# Altium PCB SPARKy watch PCB MK2.PcbDoc (part 1 of 2)
Units mm, origin at the board's own origin, x right, y up, seen from the top; angles counter-clockwise.
Board outline 67 x 34.75 mm, 2 copper layers (Component Side, Bottom Layer), stack 0.325 mm thick; 94 components, 71 nets, 348 pads, 81 vias.
Unrouted connection lines stored in the file: 3.
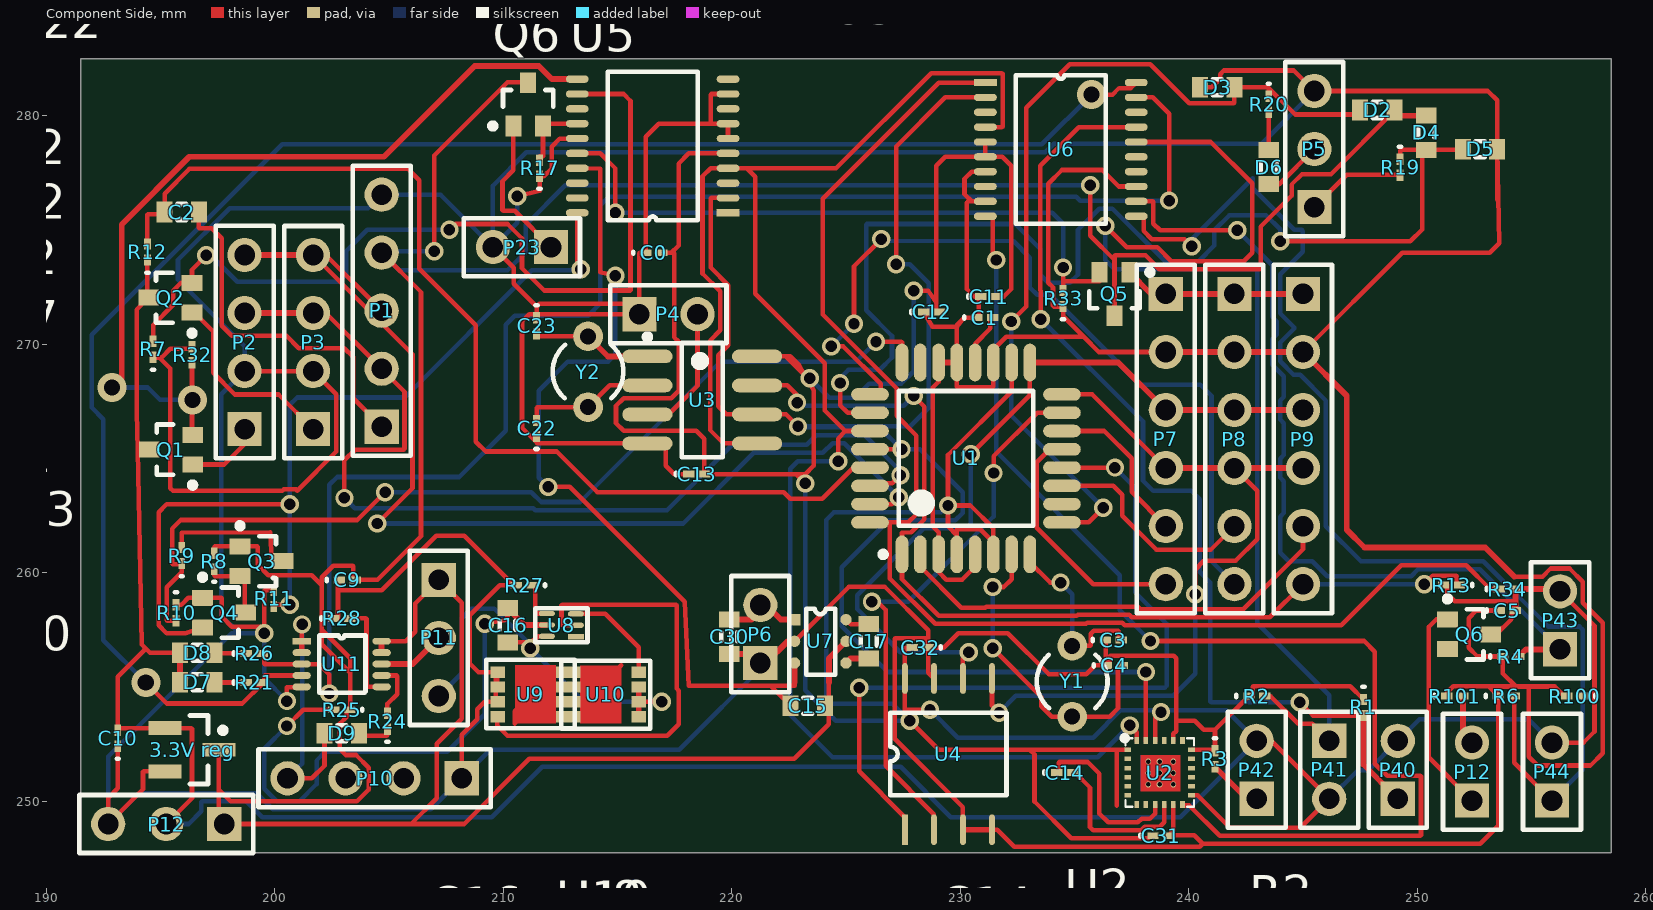
[diagram p0: Component Side view]
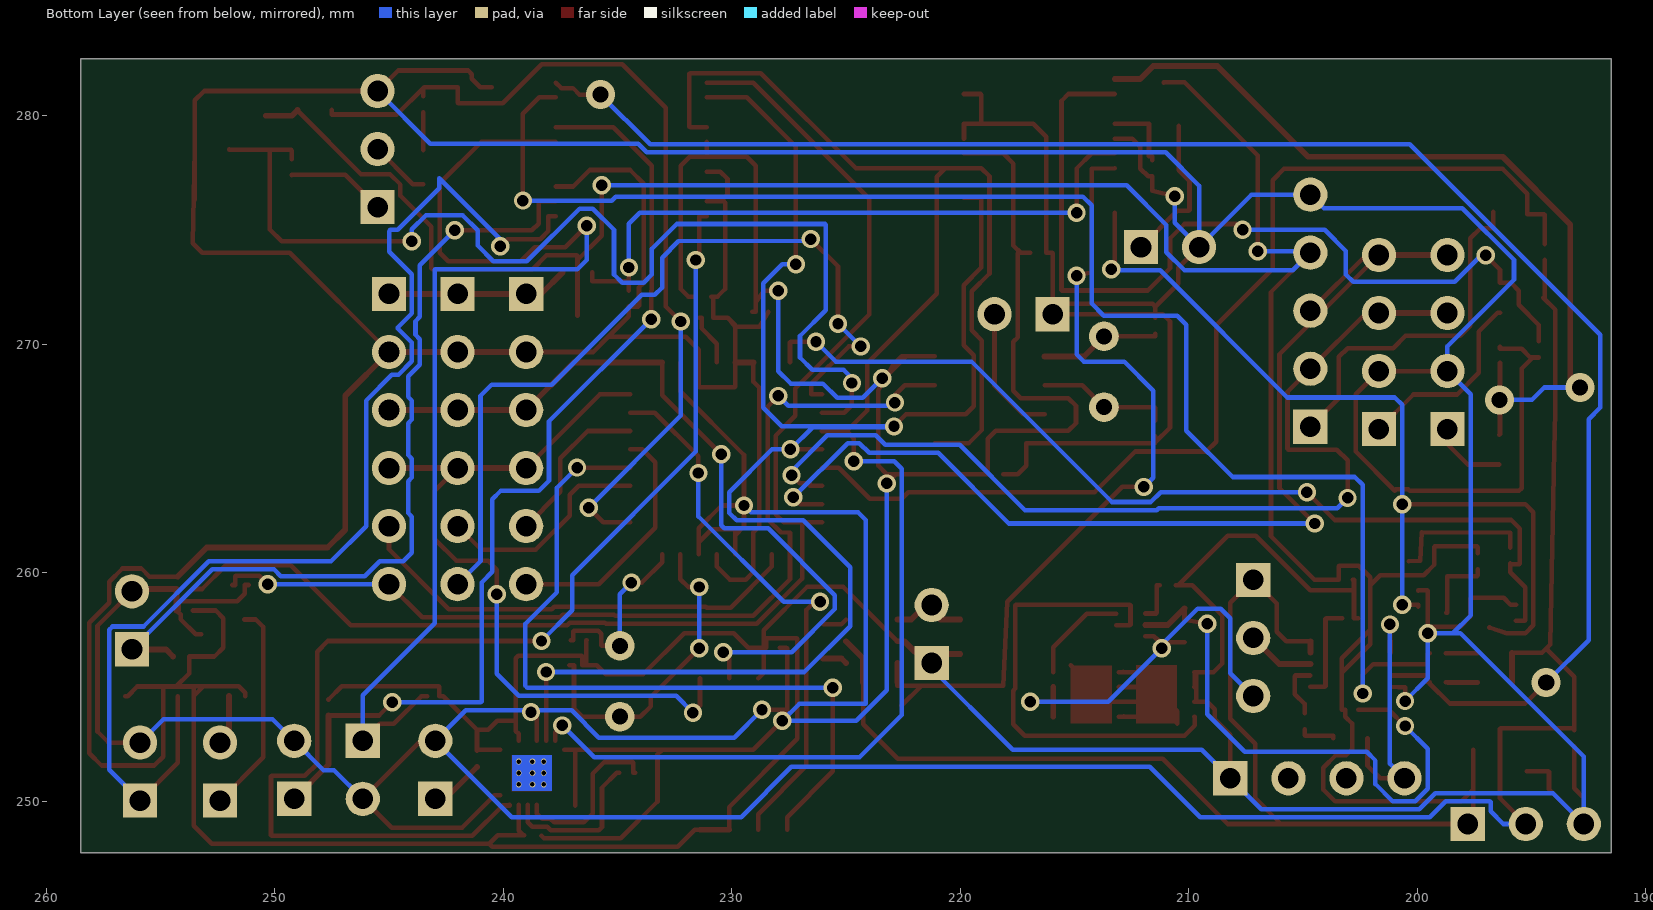
[diagram p1: Bottom Layer view, seen from below]

## Layer stack, top to bottom
Top Solder: solder mask 0.0102, Solder Resist, Dk 3.5
Component Side: signal copper 0.0356
Dielectric 1: core 0.254, FR-4, Dk 4.2
Bottom Layer: signal copper 0.0356
Solder Side: solder mask 0.0102, Solder Resist, Dk 3.5

## Board outline
191.5,247.75 191.5,282.5 258.5,282.5 258.5,247.75

## Design rules (kind name [scope] priority, off if disabled: settings)
AcuteAngle [All] p1: minimum=9.00000000000000E+0001 checktracksonly=FALSE
AssemblyTestpoint [All] p1: testpointundercomponent=TRUE minsize=1 maxsize=2.5 preferedsize=1.5 minholesize=0 maxholesize=1 preferedholesize=0.8 testpointgrid=0.025 usegrid=TRUE gridtolerance=0 allowsidetop=TRUE allowsidebottom=TRUE
Clearance "Clearance Ceramic to Board" [InComponentClass('Ceramic') vs ((ObjectKind = 'Arc') Or (ObjectKind = 'Track')) And (Layer = 'KeepOutLayer') And (Keepout = 'False')] p1: gap=4.95 // Ceramic component to board outline
Clearance [All] p2: gap=0.15
ComponentClearance [All] p1: gap=0.25 collisioncheckmode=3 verticalgap=0.25 showdistances=FALSE
DiffPairsRouting [All] p1: maxlimit=0.1 minlimit=0.1 mostfreqgap=0.1 toplayer_minwidth=0.15 toplayer_maxwidth=0.15 toplayer_prefwidth=0.15 bottomlayer_minwidth=0.15 bottomlayer_maxwidth=0.15 bottomlayer_prefwidth=0.15 maxuncoupledlength=12.7
FabricationTestpoint [All] p1: side=3 testpointundercomponent=TRUE minsize=1 maxsize=2.5 preferedsize=1.5 minholesize=0 maxholesize=1 preferedholesize=0.8 testpointgrid=0.025 allowsidetop=TRUE allowsidebottom=TRUE usegrid=TRUE gridtolerance=0
Height [All] p1: minheight=0 maxheight=50 prefheight=12.5
HoleSize [All] p1: absolutevalues=TRUE maxlimit=6.5 minlimit=0.3 maxpercent=80.000 minpercent=20.000
HoleToHoleClearance [All] p1: gap=0.25 allowstackedmicrovias=TRUE
MinimumAnnularRing [All] p1: minimumring=0.15
MinimumSolderMaskSliver [All] p1: minsoldermaskwidth=0.15
PlaneClearance [All] p1: clearance=0.5
PlaneConnect [All] p1: planeconnectstyle=Relief reliefexpansion=0.5 reliefentries=4 reliefconductorwidth=0.25 reliefairgap=0.25
PolygonConnect [All] p1: connectstyle=Relief reliefconductorwidth=0.25 reliefentries=4 polygonreliefangle="90 Angle" airgapwidth=0.25
RoutingCorners [All] p1: cornerstyle=45-Degree minsetback=2.5 maxsetback=2.5
RoutingVias [All] p1: holewidth=0.5 width=0.8 viastyle="Through Hole" minholewidth=0.3 minwidth=0.6 maxholewidth=0.7 maxwidth=1
SilkToSilkClearance [All] p1: silktosilkclearance=0.25
SilkToSolderMaskClearance [IsPad] p1: minsilkscreentomaskgap=0.25 clearancetoexposedcopper=TRUE
SolderMaskExpansion [All] p1: expansion=0.075
UnpouredPolygon [All] p1: allowunpoured=FALSE
Width [All] p1: maxlimit=1 minlimit=0.15 preferedwidth=0.2
16 further rules are at their usual default settings.

## Classes and differential pairs
component class "battery sensor": R8 R9 R10 R11
component class Designator: R12 R13 U1 Y1
component class Prefrels: R17 R19 R20 U5 U7
component class RTC: U2 U3 Y2
component class Screens: R33
component class "Serial devices": R7 R32
component class "V stuff": R21 R24 R25 R26 R27 R28 U8 U9 U10 U11

## Components (designator, comment, footprint, x,y, rotation, side; value= is the part's Value field where it differs from the comment)
"3.3V reg" "Volt Reg" SOT23_M 196.377,252.25 r0 top
C0 "Cap Semi" 0603 216.589,274 r0 top
C1 "Cap Semi" 0603 231.075,271.161 r0 top
C2 "Cap" J1-0603 195.927,275.784 r180 top
C3 "Cap Semi" 0603 236.7,257.05 r0 top
C4 "Cap Semi" 0603 236.75,255.943 r0 top
C5 "Cap Semi" 0603 253.949,258.343 r0 top
C9 "Cap Semi" 0603 203.177,259.682 r0 top
C10 "Cap Semi" 0603 193.127,252.75 r90 top
C11 "Cap Semi" 0603 231.25,272.084 r0 top
C12 "Cap Semi" 0603 228.75,271.411 r0 top
C13 "Cap Semi" 0603 218.46,264.311 r0 top
C14 "Cap Semi" 0603 234.579,251.25 r0 top
C15 "Cap" J1-0603 223.329,254.175 r0 top
C16 "Cap" J1-0603 210.187,257.696 r90 top
C17 "Cap" J1-0603 226,256.995 r90 top
C22 "Cap" 0603 211.46,266.311 r90 top
C23 "Cap" 0603 211.46,270.811 r270 top
C30 "C16" J1-0603 219.885,257.196 r270 top
C31 "Cap Semi" 0603 238.785,248.483 r0 top
C32 "Cap Semi" 0603 228.25,256.721 r180 top
D2 "Diode" J1-0603 248.25,280.25 r0 top
D3 "Diode" J1-0603 241.25,281.25 r0 top
D4 "Diode" J1-0603 250.399,279.25 r90 top
D5 "Diode" J1-0603 252.75,278.54 r180 top
D6 "de ??" J1-0603 243.5,277.75 r270 top
D7 "FULL" J1-0603 196.602,255.196 r0 top
D8 "Chargeing" J1-0603 196.602,256.5 r0 top
D9 "power ok" J1-0603 202.927,252.964 r0 top
P1 "FTDI headder" HDR1X5 204.677,266.384 r90 top
P2 "ESP8266" HDR1X4 198.677,266.284 r90 top
P3 "RN42-1/rm" HDR1X4 201.676,266.284 r90 top
P4 "Header 2" HDR1X2 215.96,271.311 r0 top
P5 "External Port" HDR1X3 245.5,276 r90 top
P6 "Header Lasar" HDR1X2 221.25,256.045 r90 top
P7 "Screen 1" HDR1X6 239,272.199 r270 top
P8 "Screen 2" HDR1X6 242,272.199 r270 top
P9 "Screen 3" HDR1X6 245,272.199 r270 top
P10 "USB" HDR1X4 208.177,251 r180 top
P11 "battery header" HDR1X3 207.177,259.682 r270 top
P12 "Buzzer" HDR1X2 252.399,250.024 r90 top
P12 "V rails" HDR1X3 197.787,249 r180 top
P23 "LED conector" HDR1X2 212.089,274.25 r180 top
P40 "SW1 (enter)" HDR1X2 249.149,250.099 r90 top
P41 "SW2 (Escape)" HDR1X2 246.149,252.639 r270 top
P42 "SW3" HDR1X2 242.974,250.099 r90 top
P43 "SW4" HDR1X2 256.25,256.643 r90 top
P44 "SW5" HDR1X2 255.899,250.024 r90 top
Q1 "2N7000" ONSC-SOT-323-3-419-04_V 195.452,265.384 r180 top
Q2 "2N7000" ONSC-SOT-323-3-419-04_V 195.427,272.034 r180 top
Q3 "MESFET-N" ONSC-SOT-323-3-419-04_V 199.427,260.5 r0 top
Q4 "MESFET-P" ONSC-SOT-323-3-419-04_V 197.787,258.25 r0 top
Q5 "2N7000" ONSC-SOT-323-3-419-04_V 236.75,272.199 r270 top
Q6 "2N7000" ONSC-SOT-323-3-419-04_V 252.275,257.3 r0 top
Q6 "2N7000" ONSC-SOT-323-3-419-04_V 211.089,280.5 r90 top
R1 "Res1" 0603 247.649,254.099 r270 top
R2 "Res1" 0603 242.974,254.599 r0 top
R3 "Res1" 0603 241.149,251.849 r270 top
R4 "Res1" 0603 254.099,256.33 r0 top
R6 "Res1" 0603 253.899,254.599 r0 top
R7 "Res3" 0603 194.677,269.784 r90 top
R8 "Res3" 0603 197.352,260.5 r90 top
R9 "Res3" 0603 195.928,260.75 r90 top
R10 "Res3" 0603 195.677,258.25 r270 top
R11 "Res11" 0603 199.953,258.868 r270 top
R12 "Res1" 0603 194.427,274.034 r90 top
R13 "Res1" 0603 251.5,259.459 r180 top
R17 "Res1" 0603 211.589,277.7 r90 top
R19 "Res1" 0603 249.25,277.75 r270 top
R20 "Res1" 0603 243.5,280.5 r270 top
R21 "Res1" 0603 199.102,255.196 r0 top
R24 "Res1" 0603 204.927,253.5 r90 top
R25 "Res1" 0603 202.927,254 r180 top
R26 "Res1" 0603 199.102,256.466 r0 top
R27 "Res1" 0603 210.927,259.446 r180 top
R28 "Res1" 0603 202.927,258 r0 top
R32 "Res3" 0603 196.377,269.534 r270 top
R33 "Res3" 0603 234.5,272 r90 top
R34 "Res1" 0603 253.949,259.284 r0 top
R100 "Res1" 0603 256.899,254.599 r180 top
R101 "Res1" 0603 251.649,254.599 r0 top
U1 "ATmega8-16AU" 32A_N 230.25,265 r90 top
U2 "Component_1" MPU-9255 237.328,252.249 r0 top
U3 "MCP79412T-I/SN" SOIC-SN8_N 218.709,267.56 r0 top
U4 "Component_1" SOP8 227.579,248.75 r90 top
U5 "Component_1" SOP20 219.839,275.75 r180 top
U6 "Component_1" SOP20 231.1,281.45 r0 top
U7 "LTC3200" SOP6 222.749,257.945 r0 top
U8 "bq29700" DSE 213.177,257.196 r180 top
U9 "CSD16406Q3" Q3 209.75,255.646 r0 top
U10 "CSD16406Q3" Q3 215.927,253.696 r180 top
U11 "MCP73833/4" SOP10 201.177,257 r0 top
Y1 "16MHz" R38 234.899,255.25 r0 top
Y2 "32.768Mhz" R38 213.71,268.794 r180 top

## Footprints (in the part's own frame and the unit in brackets; to place one, negate y for a bottom-side part, rotate by r counter-clockwise, add the part's x,y. Pads: shape width x height; smd on the part's side, far side on the other; paste and mask are expansions set on the pad)
32A_N [mm] "Thin QFP, 32-Leads, Body 7x7mm, Pitch 0.8mm, IPC Medium Density"
  oval 1.65x0.55 smd: 1(-4.2,2.8) 2(-4.2,2) 3(-4.2,1.2) 4(-4.2,0.4) 5(-4.2,-0.4) 6(-4.2,-1.2) 7(-4.2,-2) 8(-4.2,-2.8) 17(4.2,-2.8) 18(4.2,-2) 19(4.2,-1.2) 20(4.2,-0.4) 21(4.2,0.4) 22(4.2,1.2) 23(4.2,2) 24(4.2,2.8)
  oval 0.55x1.65 smd: 9(-2.8,-4.2) 10(-2,-4.2) 11(-1.2,-4.2) 12(-0.4,-4.2) 13(0.4,-4.2) 14(1.2,-4.2) 15(2,-4.2) 16(2.8,-4.2) 25(2.8,4.2) 26(2,4.2) 27(1.2,4.2) 28(0.4,4.2) 29(-0.4,4.2) 30(-1.2,4.2) 31(-2,4.2) 32(-2.8,4.2)
  silkscreen extent -4.32,-2.95 2.95,3.75, body extent -3.5,-3.5 3.5,3.5, height 1.2
0603 [mm] "Chip Inductor, Body 0.6x0.3mm, IPC High Density"
  rect 0.5x0.3 smd: 1(-0.35,0) 2(0.35,0)
  silkscreen extent -0.9,-0.05 -0.9,0.05, body extent -0.33,-0.18 0.33,0.18, height 0.55
DSE [mm]
  rect 0.7x0.23 smd: 1(0,0)
  oval 0.7x0.23 smd: 2(0,-0.5) 3(0,-1) 4(1.27,-1.016) 5(1.27,-0.516) 6(1.27,-0.016)
  silkscreen extent -0.51,-1.25 1.78,0.25
HDR1X2 [mm] "Connector; Header; 2 Position"
  rect 1.5x1.5 hole 0.9: 1(0,0)
  round 1.5 hole 0.9: 2(2.54,0)
  silkscreen extent -1.27,-1.27 3.81,1.27
HDR1X3 [mm] "Connector; Header; 3 Position"
  rect 1.5x1.5 hole 0.9: 1(0,0)
  round 1.5 hole 0.9: 2(2.54,0) 3(5.08,0)
  silkscreen extent -1.27,-1.27 6.35,1.27
HDR1X4 [mm] "Connector; Header; 4 Position"
  rect 1.5x1.5 hole 0.9: 1(0,0)
  round 1.5 hole 0.9: 2(2.54,0) 3(5.08,0) 4(7.62,0)
  silkscreen extent -1.27,-1.27 8.89,1.27
HDR1X5 [mm] "Connector; Header; 5 Position"
  rect 1.5x1.5 hole 0.9: 1(0,0)
  round 1.5 hole 0.9: 2(2.54,0) 3(5.08,0) 4(7.62,0) 5(10.16,0)
  silkscreen extent -1.27,-1.27 11.43,1.27
HDR1X6 [mm] "Connector; Header; 6 Position"
  rect 1.5x1.5 hole 0.9: 1(0,0)
  round 1.5 hole 0.9: 2(2.54,0) 3(5.08,0) 4(7.62,0) 5(10.16,0) 6(12.7,0)
  silkscreen extent -1.27,-1.27 13.97,1.27
J1-0603 [mm] "Chip Resistor, Body 1.6x0.8mm, IPC High Density"
  rect 0.7x0.9 smd: 1(-0.75,0) 2(0.75,0)
  silkscreen extent -0.2,-0.35 0.2,0.35, body extent -0.85,-0.48 0.85,0.48, height 0.9
MPU-9255 [mm]
  rect 0.3x0.2 smd: 1(0,0) 2(0,-0.4) 3(0,-0.8) 4(0,-1.2) 5(0,-1.6) 6(0,-2) 13(2.8,-2) 14(2.8,-1.6) 15(2.8,-1.2) 16(2.8,-0.8) 17(2.8,-0.4) 18(2.8,0)
  rect 0.2x0.3 smd: 7(0.4,-2.4) 8(0.8,-2.4) 9(1.2,-2.4) 10(1.6,-2.4) 11(2,-2.4) 12(2.4,-2.4) 19(2.4,0.4) 20(2,0.4) 21(1.6,0.4) 22(1.2,0.4) 23(0.8,0.4) 24(0.4,0.4)
  Component Side region: 0.552,-1.817 2.302,-1.817 2.302,-0.227 0.552,-0.227
  Bottom Layer region: 0.549,-1.812 2.299,-1.812 2.299,-0.222 0.549,-0.222
  silkscreen extent -0.23,-2.5 2.9,0.61
ONSC-SOT-323-3-419-04_V [mm] "SOT23, 3-Leads, Body 2x1.25mm, Pitch 0.65mm"
  rect 0.9x0.7 smd: 1(-0.95,0.65) 2(-0.95,-0.65) 3(0.95,0)
  silkscreen extent -1.08,-1.1 0.63,1.67, body extent -0.63,-1 0.63,1, height 1
Q3 [mm]
  rect 0.63x0.5 smd: 1(0,0) 2(0,-0.65) 3(0,-1.3) 4(0,-1.95) 5(2.87,-1.95) 6(2.87,-1.3) 7(2.87,-0.65) 8(2.87,0)
  Component Side region: 0.76,-2.246 2.56,-2.246 2.56,0.304 0.76,0.304
  silkscreen extent -0.5,-2.45 3.38,0.53
R38 [mm] "Crystal, Thru-Hole; 2 Leads; Body 3.1 x 8.2 mm (Dia.xH)"
  round 1.3 hole 0.7: 1(0,1.55) 2(0,-1.55)
  silkscreen extent -1.55,-1.19 1.55,1.17
SOIC-SN8_N [mm] "SOIC, 8-Leads, Body 4.9x3.8mm, Pitch 1.27mm, IPC Medium Density"
  oval 2.2x0.6 smd: 1(-2.4,1.905) 2(-2.4,0.635) 3(-2.4,-0.635) 4(-2.4,-1.905) 5(2.4,-1.905) 6(2.4,-0.635) 7(2.4,0.635) 8(2.4,1.905)
  silkscreen extent -2.52,-2.5 0.9,2.88, body extent -2,-2.5 2,2.5, height 1.75
SOP6 [mm]
  rect 0.5x0.5 smd: 1(0,0)
  round 0.5 smd: 2(0,-0.95) 3(0,-1.9) 4(2.25,-1.9) 5(2.25,-0.95) 6(2.25,0)
  silkscreen extent 0.51,-2.41 1.78,0.48
SOP8 [mm]
  rect 1.345x0.25 smd: 1(0,0)
  oval 1.345x0.25 smd: 2(0,-1.27) 3(0,-2.54) 4(0,-3.81) 5(6.62,-3.81) 6(6.62,-2.54) 7(6.62,-1.27) 8(6.62,0)
  silkscreen extent 1.51,-4.45 5.11,0.64
SOP10 [mm]
  rect 0.8x0.3 smd: 1(0,0)
  oval 0.8x0.3 smd: 2(0,-0.5) 3(0,-1) 4(0,-1.5) 5(0,-2) 6(3.5,-2) 7(3.5,-1.5) 8(3.5,-1) 9(3.5,-0.5) 10(3.5,0)
  silkscreen extent 0.76,-2.25 2.79,0.25
SOP20 [mm]
  rect 1x0.32 smd: 1(0,0)
  oval 1x0.32 smd: 2(0,-0.65) 3(0,-1.3) 4(0,-1.95) 5(0,-2.6) 6(0,-3.25) 7(0,-3.9) 8(0,-4.55) 9(0,-5.2) 10(0,-5.85) 11(6.6,-5.85) 12(6.6,-5.2) 13(6.6,-4.55) 14(6.6,-3.9) 15(6.6,-3.25) 16(6.6,-2.6) 17(6.6,-1.95) 18(6.6,-1.3) 19(6.6,-0.65) 20(6.6,0)
  silkscreen extent 1.34,-6.18 5.26,0.33
SOT23_M [mm] "SOT23, 3-Leads, Body 2.9x1.3mm, Pitch 0.95mm, Lead Span 2.3mm - Reverse Pinning, IPC Low Density"
  rect 1.45x0.6 smd: 1(1.175,0) 2(-1.175,-0.95) 3(-1.175,0.95)
  silkscreen extent -0.1,-1.5 1.48,1.5, body extent -0.7,-1.5 0.7,1.5, height 1.1

## Part data
"3.3V reg": "Voltage Regulator"
C0 C1 C3 C4 C5 C9 C10 C11 C12 C13 C14 C31 C32: "Capacitor (Semiconductor SIM Model)"
C2 C15 C16 C17 C22 C23: "Capacitor"
C30: library part Cap, "Capacitor"
D2 D3 D4 D5: "Default Diode"
D6: library part Diode, "Default Diode"
D7 D8 D9: library part LED1, "Typical RED GaAs LED"
P1: library part "Header 5", "Header, 5-Pin"
P2 P3 P10: library part "Header 4", "Header, 4-Pin"
P4: "Header, 2-Pin"
P5 P11 P12: library part "Header 3", "Header, 3-Pin"
P6 P12 P23 P40 P41 P42 P43 P44: library part "Header 2", "Header, 2-Pin"
P7 P8 P9: library part "Header 6", "Header, 6-Pin"
Q1 Q2 Q5 Q6 Q6: "Small Signal MOSFET, 200 mA, 60 V, N-Channel, 3-Pin TO-92, Bulk Box"
Q3: "N-Channel MESFET"
Q4: "P-Channel MESFET"
R1 R2 R3 R4 R6 R7 R8 R9 R10 R12 R13 R17 R19 R20 R21 R24 R25 R26 R27 R28 R32 R33 R34 R100 R101: "Resistor"
R11: library part Res3, "Resistor"
U1: "8-bit AVR Microcontroller, 4.5-5.5V, 16MHz, 8KB Flash, 512 Bytes EEPROM, 1KB SRAM, 32-pin TQFP, Industrial Grade (-40°C to 85°C)"
U3: "I2C Real-Time Clock/Calendar with EEPROM, SRAM, Unique ID and Battery Switchover, 8-Pin SOIC, Industrial Temperature, Tape and Reel"
U7 U8 U9 U10 U11: library part Component_1
Y1 Y2: library part XTAL, "Crystal Oscillator"

## Via types
v1: diameter 0.8, hole 0.5, Component Side to Bottom Layer, 68 vias
v2: diameter 0.25, hole 0.2, Component Side to Bottom Layer, 9 vias
v3: diameter 1.27, hole 0.711, Component Side to Bottom Layer, 4 vias

## Nets (pads, with @x,y where several pads share a name; then routed paths per layer and width w, separated by ;. In a path a pad name is that pad's centre, name@x,y a point inside that pad or via, vN(x,y) a via of type N, cw(c..) or ccw(c..) an arc to the next point about the centre after c; other vN are vias at no path point)
3.3V: "3.3V reg.3" C0.2 C5.2 C10.2 C11.2 C12.2 C13.2 C31.1 C32.2 D7.1 D8.1 P12.2@195.247,249 P40.2 P41.2 P42.2 P43.2 P44.2 Q1.3 Q2.3 Q6.3@253.225,257.3 R12.1 R13.2 R34.2 U1.4 U1.6 U1.18 U2.1 U2.8 U2.13 U2.22 U3.8 U4.8 U5.5 U6.5 U6.6 | length 277.4
  Component Side w0.2: C10.2@193.127,253.1 C10.2@193.127,253.2 ; R12.1@194.427,273.684 194.427,272.761 194.412,272.745 194.412,272.034 Q2.3@194.477,272.034 193.95,271.507 193.95,267.561 193.961,267.024 193.995,265.374 194.17,256.858 194.354,256.673 ; P12.2@195.247,249 196.377,250.129 196.377,253.165 196.342,253.2 195.202,253.2 C10.2@193.127,253.2 ; D8.1@195.852,256.5 195.852,256.489 194.539,256.489 194.354,256.673 ; C0.2@216.939,274 217.358,274 ; U5.5@219.839,278.35 218.123,278.35 217.678,277.906 217.678,274.32 217.358,274 ; U3.8@221.109,269.466 222.367,269.466 ; v1(223.215,263.906) 222.81,264.311 ; v1(223.418,268.503) 223.329,268.503 v1@223.19,268.643 ; C32.2@227.9,256.721 227.608,256.721 227.579,256.692 U4.8@227.579,255.37 227.579,253.995 ; v1(227.965,272.339) 228.6,272.339 228.956,271.831 ; v1(228.676,253.995) 227.579,253.995 ; C12.2@229.1,271.411 228.956,271.411 228.956,271.831 ; U1.4@229.85,260.8 229.85,261.64 ; U6.5@231.1,278.85 231.089,278.85 U6.6@231.089,278.2 ; U1.6@231.45,260.8 U1.6@231.45,261.331 ; C11.2@231.6,272.084 231.902,272.084 232.232,272.415 232.232,277.812 231.845,278.2 U6.6@231.1,278.2 U6.6@231.089,278.2 ; U1.18@232.25,269.2 232.25,267.937 229.464,265.151 v1(229.464,262.941) ; 236.855,249.809 236.855,252.173 236.931,252.249 ; U2.1@237.328,252.249 236.931,252.249 ; C31.1@238.328,248.483 238.218,248.372 234.86,248.372 233.25,249.983 233.25,252.049 233.05,252.249 ; U2.22@238.528,252.649 238.528,253.641 v1(238.785,253.898) ; U2.13@240.128,250.249 240.388,250.249 241.805,248.833 244.882,248.833 P41.2@246.149,250.099 243.609,252.639 P42.2@242.974,252.639 ; R13.2@251.15,259.459 251.308,259.459 251.308,259.08 251.638,258.75 254.178,258.75 254.203,258.724 254.203,258.343 C5.2@254.251,258.295 ; Q6.3@253.225,257.3 253.462,257.3 254.124,257.962 254.124,258.168 C5.2@254.251,258.295 ; C5.2@254.299,258.343 C5.2@254.251,258.295 ; P44.2@255.899,252.564 257.276,252.564 257.759,253.047 257.759,257.674 P43.2@256.25,259.183 ; C10.2@193.127,253.2 193.127,255.446 194.354,256.673 ; 217.358,274 217.449,274 217.475,273.975 217.475,270.307 217.678,270.104 217.678,267.97 217.348,267.64 215.265,267.64 214.935,267.31 214.935,266.548 215.265,266.217 218.44,266.217 218.796,265.862 218.796,264.311 C13.2@218.81,264.311 222.81,264.311 ; 222.367,269.466 v1@223.19,268.643 ; 222.367,269.466 222.567,269.466 222.91,269.123 v1@223.19,268.643 ; 222.81,264.311 223.215,264.311 223.593,264.688 223.593,267.952 223.309,268.439 v1@223.19,268.643 ; 227.579,253.995 227.579,253.726 v1(227.787,253.517) 229.055,252.249 233.05,252.249 ; 228.956,271.831 228.956,277.812 229.343,278.2 U6.6@231.089,278.2 ; v1(229.464,262.941) 229.464,262.026 229.85,261.64 ; v1(229.464,262.941) 230.447,262.941 231.45,261.938 U1.6@231.45,261.331 ; 229.85,261.64 229.85,261.874 229.878,261.902 230.879,261.902 U1.6@231.45,261.331 ; 233.05,252.249 236.931,252.249
  Component Side w0.254: D7.1@195.852,255.196 D8.1@195.852,256.489 ; C5.2@254.299,258.343 R34.2@254.299,259.284 256.149,259.284 P43.2@256.25,259.183
  Bottom Layer w0.2: P12.2@195.247,249 196.232,249 196.787,249.555 196.787,249.963 196.825,250 198.755,250 199.455,249.3 209.5,249.3 211.7,251.5 227.39,251.5 229.59,249.3 239.635,249.3 P42.2@242.974,252.639 241.639,253.975 v1@238.785,253.975 ; v1(223.215,263.906) 223.215,254.851 224.549,253.517 v1(227.787,253.517) 227.051,254.254 224.142,254.254 224.142,262.306 224.472,262.636 229.159,262.636 v1(229.464,262.941) ; v1(223.418,268.503) 224.272,267.65 225.389,267.65 226.016,268.277 227.421,268.277 227.965,268.821 v1(227.965,272.339) ; v1(228.676,253.995) 229.89,252.781 235.814,252.781 237.007,253.975 v1@238.785,253.975 ; v1(238.785,253.898) v1@238.785,253.975 ; P41.2@246.149,250.099 247.408,251.358 247.868,251.358 P40.2@249.149,252.639 250.101,253.591 254.872,253.591 P44.2@255.899,252.564
GND: "3.3V reg.2" C0.1 C1.1 C3.1 C4.1 C5.1 C9.1 C10.1 C11.1 C12.1 C13.1 C14.1 C22.1 C23.1 C30.2 C31.2 C32.1 D3.1 D5.1 P1.5 P2.2 P3.2 P4.1 P5.3 P6.1 P7.2 P8.2 P9.2 P10.1 P12.3 P23.2 Q4.1 R1.1 R2.1 R3.1 R4.1 R6.1 R7.1 R10.1 R11.1 R17.1 R27.2 R28.1 R32.1 R33.1 R100.2 R101.1 U1.3 U1.5 U1.19 U1.21 U1.22 U2.9 U2.11 U2.18 U2.20 U3.4 U4.3 U4.4 U4.7 U5.6 U5.7 U5.9 U5.15 U6.7 U6.9 U6.13 U7.2 U9.1 U9.2 U9.3 U11.5 | length 467.5
  Component Side w0.2: C10.1@193.127,252.4 193.127,250.559 192.707,250.139 P12.3@192.707,249 194.234,250.526 194.234,251.275 194.259,251.3 195.202,251.3 ; R7.1@194.677,269.434 194.677,269.418 194.945,269.418 ; R10.1@195.677,258.6 195.915,258.6 196.215,258.9 Q4.1@196.837,258.9 197.663,258.9 197.688,258.875 197.688,258.064 198.12,257.632 199.517,257.632 v1@199.542,257.658 ; R32.1@196.377,269.884 196.377,269.799 195.428,269.799 195.047,269.418 194.945,269.418 ; P2.2@198.677,268.824 200.762,268.824 ; v1(199.542,257.353) v1@199.542,257.658 ; R11.1@199.953,259.218 199.953,259.232 199.568,259.232 199.542,259.207 v1@199.542,257.658 ; v1(200.533,254.381) 200.533,254.975 U11.5@201.177,255 ; 200.763,268.824 P3.2@201.676,268.824 202.692,267.808 202.692,265.303 200.98,263.591 200.929,263.642 200.391,263.642 200.326,263.577 195.545,263.577 195.428,263.695 195.428,268.935 194.945,269.418 ; R28.1@202.577,258 202.768,258 202.768,259.232 ; C9.1@202.827,259.682 202.768,259.682 202.768,259.232 ; P10.1@208.177,251 208.177,252.902 208.866,253.591 208.866,254.018 209.194,254.346 U9.3@209.677,254.346 ; P23.2@209.549,274.25 210.461,273.338 210.461,272.639 211.46,271.639 ; U9.3@209.75,254.346 U9.3@209.677,254.346 ; U9.2@209.75,254.996 209.728,254.996 U9.1@209.728,255.646 ; U9.1@209.75,255.646 U9.1@209.728,255.646 ; R27.2@210.577,259.446 R27.2@210.464,259.446 ; v1(210.617,276.479) 211.589,276.708 R17.1@211.589,277.343 ; C22.1@211.46,265.961 211.46,265.707 ; C23.1@211.46,271.161 C23.1@211.46,271.311 ; R17.1@211.589,277.35 R17.1@211.589,277.343 ; U5.15@213.239,279 212.471,279 212.115,278.644 212.115,277.685 211.772,277.343 R17.1@211.589,277.343 ; C0.1@216.239,274 C0.1@216.23,274 ; C13.1@218.11,264.311 217.487,264.311 217.119,264.679 217.119,265.656 U3.4@216.309,265.656 211.512,265.656 ; U5.6@219.839,279 219.837,279 U5.7@219.837,279.65 ; U5.7@219.839,279.65 U5.7@219.837,279.65 ; U5.9@219.839,280.95 219.1,280.95 219.075,280.925 219.075,279.675 219.1,279.65 ; U7.2@222.749,256.995 225.129,259.375 226.705,259.375 228.6,257.48 C32.1@228.6,256.721 ; C12.1@228.4,271.411 228.778,270.764 229.85,270.764 ; U4.7@228.849,255.37 228.6,255.619 C32.1@228.6,256.721 ; U1.22@229.05,269.2 229.05,268.351 228.803,268.104 228.803,262.019 229.05,261.772 U1.3@229.05,260.8 229.05,260.041 229.393,259.698 230.079,259.698 230.65,260.269 U1.5@230.65,260.8 ; U4.3@230.119,248.75 230.119,249.738 227.127,252.73 227.127,257.099 227.152,257.124 228.473,257.124 228.498,257.099 228.498,256.721 C32.1@228.6,256.721 ; C11.1@230.9,272.084 C11.1@230.81,272.084 ; U6.9@231.1,276.25 230.505,276.25 ; U6.7@231.1,277.55 230.505,277.55 230.188,277.232 230.188,276.567 230.505,276.25 ; U4.4@231.389,248.75 231.615,248.75 232.365,248 240.482,248 240.614,248.133 ; C14.1@234.229,251.25 234.315,251.25 234.315,251.689 234.34,251.714 235.585,251.714 236.093,251.206 236.093,249.453 236.474,249.072 237.777,249.072 237.937,249.233 238.303,249.233 238.528,249.458 U2.9@238.528,249.849 ; C3.1@236.35,257.05 236.372,257.05 C4.1@236.372,255.943 ; U6.13@237.7,276.9 236.931,276.9 236.209,277.622 234.455,277.622 233.85,277.017 233.85,272.694 234.061,272.483 234.061,271.675 234.086,271.65 R33.1@234.5,271.65 234.5,271.226 235.397,270.329 ; P7.2@239,269.659 236.068,269.659 235.397,270.329 ; C31.2@239.075,248.5 C31.2@239.116,248.5 ; U2.11@239.328,249.849 239.328,248.712 C31.2@239.116,248.5 ; U2.20@239.328,252.649 239.328,252.942 239.446,253.06 239.446,253.535 ; U2.18@240.128,252.249 R3.1@241.149,252.249 ; D3.1@240.5,281.25 241.001,281.25 241.373,281.623 241.373,281.815 241.535,281.977 244.603,281.977 P5.3@245.5,281.08 253.09,281.08 253.5,280.67 D5.1@253.5,278.54 ; R3.1@241.149,252.199 R3.1@241.149,252.249 ; P9.2@245,269.659 249.344,274.002 253.182,274.002 253.598,274.418 D5.1@253.5,278.54 ; R1.1@247.649,254.449 247.072,255.026 242.824,255.026 242.797,254.999 242.797,254.599 R2.1@242.624,254.599 241.149,253.124 ; R101.1@251.299,254.599 251.299,254.749 251.576,255.026 253.21,255.026 ; 253.5,276.33 D5.1@253.5,278.54 ; C5.1@253.599,258.343 252.592,258.343 252.25,258.001 252.25,256.721 252.641,256.33 R4.1@253.746,256.33 ; R4.1@253.749,256.33 R4.1@253.746,256.33 ; 254.25,259.829 255.482,259.829 255.836,260.183 256.664,260.183 257.25,259.597 257.25,258.678 258.115,257.813 258.115,252.095 257.581,251.562 255.27,251.562 254.889,251.943 254.889,254.991 254.864,255.016 ; R100.2@256.549,254.599 256.438,254.599 256.022,255.016 ; 202.768,259.232 204.684,259.232 207.072,261.62 208.291,261.62 R27.2@210.464,259.446 ; U9.3@209.677,254.346 U9.1@209.677,255.646 ; U9.1@209.677,255.646 U9.1@209.728,255.646 ; U9.1@209.677,255.646 208.915,255.646 208.537,256.025 208.537,258.143 209.84,259.446 R27.2@210.464,259.446 ; 211.46,265.707 211.512,265.656 ; 211.46,265.707 210.818,266.349 210.818,270.992 211.137,271.311 C23.1@211.46,271.311 ; 211.46,265.707 211.46,265.684 211.489,265.656 211.512,265.656 ; C23.1@211.46,271.311 P4.1@215.96,271.311 ; C23.1@211.46,271.311 211.46,271.639 ; 211.46,271.639 211.583,271.763 215.509,271.763 P4.1@215.96,271.311 ; P4.1@215.96,271.311 215.96,273.984 215.976,274 C0.1@216.23,274 ; C0.1@216.23,274 216.23,279.082 216.798,279.65 219.1,279.65 ; 219.1,279.65 U5.7@219.837,279.65 ; C32.1@228.6,256.721 229.282,256.721 229.913,257.352 232.08,257.352 233.882,255.55 235.522,255.55 235.915,255.943 C4.1@236.372,255.943 ; 229.85,270.764 229.85,270.827 230.184,271.161 ; 229.85,270.764 U1.21@229.85,269.2 229.85,268.148 229.875,268.122 231.425,268.122 231.45,268.148 U1.19@231.45,269.2 231.45,269.758 232.021,270.329 235.397,270.329 ; 229.85,270.764 230.184,271.161 ; 230.184,271.161 C1.1@230.725,271.161 230.81,271.161 C11.1@230.81,272.084 ; 230.505,276.25 230.353,276.25 230.294,276.191 230.294,272.415 230.624,272.084 C11.1@230.81,272.084 ; C4.1@236.372,255.943 C4.1@236.4,255.943 236.55,255.943 236.55,256.334 236.576,256.36 239.347,256.36 239.446,256.261 239.446,253.535 ; C31.2@239.116,248.5 240.247,248.5 240.614,248.133 ; 239.446,253.535 239.463,253.517 240.263,253.517 240.656,253.124 241.149,253.124 ; 240.614,248.133 252.755,248.133 253.543,248.92 R6.1@253.549,254.599 R6.1@253.546,254.599 ; R3.1@241.149,252.249 241.149,253.124 ; 253.21,255.026 254.307,255.026 ; 253.21,255.026 253.174,254.991 253.174,254.974 R6.1@253.543,254.606 ; R6.1@253.543,254.606 253.543,254.991 253.568,255.016 254.317,255.016 ; R6.1@253.543,254.606 253.543,254.599 R6.1@253.546,254.599 ; R6.1@253.543,254.606 253.546,254.602 R6.1@253.546,254.599 ; R4.1@253.746,256.33 253.746,255.587 254.307,255.026 ; 254.307,255.026 254.317,255.016 ; 254.307,255.026 256.011,255.026 256.022,255.016 ; 254.317,255.016 254.864,255.016 ; 254.864,255.016 256.022,255.016
  Component Side w0.254: C30.2@220,256.446 221.099,256.446 221.5,256.045 222.45,256.995 U7.2@222.749,256.995 ; U1.22@229.05,269.2 U1.21@229.85,269.2 ; U4.3@230.119,248.75 U4.4@231.389,248.75 ; P7.2@239,269.659 P8.2@242,269.659 P9.2@245,269.659 246.917,267.741 246.917,261.875 247.693,261.1 252.979,261.1 254.25,259.829
  Bottom Layer w0.2: v1(200.533,254.381) 199.542,255.372 v1(199.542,257.353) 198.438,257.353 ; v1(210.617,276.479) 210.617,275.318 P23.2@209.549,274.25 ; P6.1@221.5,256.045 217.702,252.247 209.424,252.247 P10.1@208.177,251 206.827,249.65 199.907,249.65 199.207,250.35 194.057,250.35 P12.3@192.707,249 192.707,251.953 198.107,257.353 198.438,257.353 ; P5.3@245.5,281.08 243.195,278.775 234.095,278.775 233.72,278.4 211.014,278.4 209.549,276.935 P23.2@209.549,274.25 ; 198.438,257.353 197.663,258.127 197.663,267.81 P2.2@198.677,268.824 198.677,269.912 195.765,272.824 195.765,273.688 198.024,275.946 204.079,275.946 P1.5@204.677,276.544 207.255,276.544 P23.2@209.549,274.25
NetC1_2: C1.2 U1.20 | length 2.3
  Component Side w0.2: U1.20@230.65,269.2 230.65,270.02 231.318,270.688 231.318,271.161 C1.2@231.425,271.161
NetC2_1: C2.1 P1.1 | length 15.6
  Component Side w0.2: C2.1@196.677,275.784 196.677,275.107 196.702,275.082 197.233,275.082 197.677,274.637 197.677,270.807 198.12,270.364 200.513,270.364 201.054,269.824 203.048,269.824 203.429,269.443 203.429,267.633 P1.1@204.677,266.384
NetC2_2: C2.2 R12.2 U1.29 | length 46.1
  Component Side w0.2: R12.2@194.427,274.384 194.427,275.666 194.452,275.692 195.177,275.692 C2.2@195.177,275.784 195.177,276.584 196.266,277.673 205.829,277.673 206.324,277.178 206.324,273.304 208.801,270.827 208.801,265.735 209.232,265.303 212.344,265.303 214.122,263.525 222.271,263.525 222.555,263.241 223.954,263.241 225.313,264.6 U1.29@226.05,264.6
NetC3_2: C3.2 U1.8 Y1.1 | length 8.1
  Component Side w0.2: U1.8@233.05,260.8 233.05,260.452 233.934,259.568 v1(234.391,259.568) ; Y1.1@234.899,256.8 235.687,256.8 235.716,256.83 235.716,257.327 235.839,257.45 236.906,257.45 236.931,257.425 236.931,257.05 C3.2@237.05,257.05
  Bottom Layer w0.2: v1(234.391,259.568) 234.899,259.06 Y1.1@234.899,256.8
NetC4_2: C4.2 U1.7 Y1.2 | length 13.9
  Component Side w0.2: v1(231.419,256.692) 233.553,254.559 233.553,254.145 233.998,253.7 Y1.2@234.899,253.7 236.537,253.7 236.906,254.068 236.906,255.943 C4.2@237.1,255.943 ; v1(231.419,259.372) 231.907,259.372 232.25,259.715 U1.7@232.25,260.8
  Bottom Layer w0.2: v1(231.419,256.692) v1(231.419,259.372)
NetC14_2: C14.2 U2.10 | length 7
  Component Side w0.2: C14.2@234.929,251.25 235.026,251.25 235.68,250.596 235.68,248.864 235.822,248.722 237.922,248.722 238.082,248.883 238.738,248.883 238.928,249.072 U2.10@238.928,249.849
NetC15_1: C15.1 U5.17 U7.3 | length 36.7
  Component Side w0.2: v1(211.963,263.754) 212.915,263.754 217.936,258.733 218.123,255.041 221.713,255.041 ; U5.17@213.239,277.7 214.249,277.675 214.249,273.152 214.908,272.993 214.909,272.993 v1(214.909,272.999) ; C15.1@222.579,254.175 221.713,255.041 ; 222.75,255.196 222.75,255.041 221.713,255.041
  Component Side w0.254: U7.3@222.749,256.045 222.75,255.196
  Bottom Layer w0.2: v1(211.963,263.754) 211.557,264.16 211.557,267.97 212.827,269.24 214.592,269.24 214.909,269.558 v1(214.909,272.999)
NetC16_1: C16.1 P11.3 U8.6 U10.1 U10.2 U10.3 | length 19.2
  Component Side w0.2: C16.1@210.187,256.946 211.176,256.946 211.531,257.212 ; v1(211.176,256.692) 211.176,256.858 211.531,257.212 ; U8.6@211.907,257.212 211.531,257.212 ; U10.2@215.927,254.346 v1(216.941,254.346)
  Component Side w0.254: U10.1@215.927,253.696 U10.2@215.927,254.346 U10.3@215.927,254.996
  Bottom Layer w0.2: P11.3@207.177,254.602 208.178,255.604 208.178,258 208.597,258.42 209.613,258.42 v1@211.176,256.858 ; v1(211.176,256.692) 213.522,254.346 v1(216.941,254.346)
NetC16_2: C16.2 R25.2 U8.5 | length 25
  Component Side w0.2: v1(200.533,253.289) 201.244,254 R25.2@202.577,254 ; v1(209.194,257.759) 210.187,257.937 C16.2@210.187,258.446
  Component Side w0.254: C16.2@210.187,258.446 210.921,257.712 U8.5@211.907,257.712
  Bottom Layer w0.2: v1(200.533,253.289) 199.542,252.298 199.542,250.546 200.088,250 201.08,250 201.828,250.749 201.828,251.778 202.209,252.159 207.543,252.159 209.194,253.809 v1(209.194,257.759)
NetC17_1: C17.1 U7.4 | length 1.1
  Component Side w0.254: U7.4@224.999,256.045 225.199,256.245 C17.1@226,256.245
NetC17_2: C17.2 U7.6 | length 1.1
  Component Side w0.2: U7.6@224.999,257.945 225.199,257.745 C17.2@226,257.745
NetC22_2: C22.2 U3.2 Y2.1 | length 5.8
  Component Side w0.2: C22.2@211.46,266.661 211.46,267.208 211.497,267.244 Y2.1@213.71,267.244 214.661,268.196 U3.2@216.309,268.196
NetC23_2: C23.2 U3.1 Y2.2 | length 5.3
  Component Side w0.2: C23.2@211.46,270.461 211.46,270.344 Y2.2@213.71,270.344
  Component Side w0.254: Y2.2@213.71,270.344 214.589,269.466 U3.1@216.309,269.466
NetC30_1: C30.1 P6.2 U7.1 | length 3.3
  Component Side w0.254: C30.1@220,257.946 220.861,257.946 221.5,258.585 222.14,257.945 U7.1@222.749,257.945
NetD2_1: D2.1 D3.2 R20.1 U1.9 | length 39.4
  Component Side w0.2: v1(232.232,270.993) 232.889,271.65 232.889,280.341 234.798,282.25 238.323,282.25 240.03,280.543 241.975,280.543 242,280.568 D3.2@242,281.25 243.459,281.25 243.5,281.209 ; U1.9@234.45,262.2 235.619,262.2 v1(236.264,262.846) ; R20.1@243.5,280.85 243.5,281.209 ; D2.1@247.5,280.25 247.5,280.053 244.656,280.053 243.5,281.209
  Bottom Layer w0.2: v1(232.232,270.993) 232.232,266.878 v1(236.264,262.846)
NetD4_1: D4.1 D5.2 R19.1 U1.26 | length 49.9
  Component Side w0.2: v1(224.739,268.3) 224.739,267.335 225.074,267 U1.26@226.05,267 ; v1(244,274.499) 249.696,274.499 250.215,275.018 D4.1@250.215,278.5 ; R19.1@249.25,278.1 249.25,278.474 249.276,278.5 D4.1@250.215,278.5 ; D5.2@252,278.54 252,278.5 D4.1@250.399,278.5 D4.1@250.215,278.5
  Bottom Layer w0.2: v1(224.739,268.3) 224.739,268.516 225.107,268.884 226.479,268.884 227.012,269.418 227.012,270.358 225.893,271.478 225.893,275.234 225.918,275.26 232.41,275.26 233.502,274.168 233.502,273.05 233.858,272.694 234.798,272.694 235.153,273.05 235.153,275.006 236.083,275.935 236.662,275.935 238.966,273.632 240.434,273.632 241.122,274.32 241.122,274.98 241.783,275.641 243.383,275.641 244,275.024 v1(244,274.499)
NetD6_1: D6.1 R20.2 | length 1.7
  Component Side w0.2: D6.1@243.5,278.5 R20.2@243.5,280.15
NetD6_2: D6.2 P5.2 | length 2.6
  Component Side w0.2: D6.2@243.5,277 243.96,277 P5.2@245.5,278.54
NetD7_2: D7.2 R21.1 | length 1.4
  Component Side w0.2: D7.2@197.352,255.196 197.352,255.194 198.653,255.194 198.653,255.196 R21.1@198.752,255.196
NetD8_2: D8.2 R26.1 | length 1.4
  Component Side w0.2: D8.2@197.352,256.5 197.352,256.466 R26.1@198.752,256.466
NetD9_1: D9.1 P10.4 U11.1 U11.2 | length 11.3
  Component Side w0.2: P10.4@200.557,251 201.622,251 202.177,251.555 D9.1@202.177,252.75 ; U11.1@201.177,257 201.177,257.717 v1(201.193,257.734)
  Component Side w0.254: U11.2@201.177,256.5 U11.1@201.177,257
  Bottom Layer w0.2: P10.4@200.557,251 201.193,251.636 v1(201.193,257.734)
NetD9_2: D9.2 R24.1 | length 1.6
  Component Side w0.2: D9.2@203.677,252.75 203.677,252.857 204.902,252.857 204.927,252.882 R24.1@204.927,253.15
NetP1_2: P1.2 P2.3 P3.3 U1.30 | length 43.7
  Component Side w0.2: P3.3@201.676,271.364 202.238,271.364 P1.2@204.677,268.924 205.677,267.924 205.677,265.423 205.638,265.384 203.517,265.384 203.048,264.915 v1(203.048,263.271) ; U1.30@226.05,263.8 226.593,263.8 226.593,263.906 227.025,263.906 v1(227.381,264.262)
  Component Side w0.254: P2.3@198.678,271.364 P3.3@201.676,271.364
  Bottom Layer w0.2: v1(203.048,263.271) 203.505,262.814 211.314,262.814 211.392,262.735 217.167,262.735 220.025,265.593 223.279,265.593 223.706,266.02 225.813,266.02 227.381,264.452 v1(227.381,264.262)
NetP1_3: P1.3 P2.4 P3.4 U1.31 | length 47.8
  Component Side w0.2: v1(204.48,262.151) 206.027,263.698 206.027,269.553 P3.4@201.676,273.904 202.238,273.904 P1.3@204.677,271.464 ; U1.31@226.05,263 227.008,263 v1(227.305,263.296)
  Component Side w0.254: P2.4@198.677,273.904 P3.4@201.676,273.904
  Bottom Layer w0.2: v1(204.48,262.151) 217.879,262.151 220.971,265.243 223.99,265.243 224.417,265.67 224.931,265.67 v1(227.305,263.296)
NetP2_1: P2.1 Q1.1 | length 3.3
  Component Side w0.2: Q1.1@196.402,264.734 197.786,264.734 198.677,265.625 P2.1@198.677,266.284
NetP3_1: P3.1 Q2.1 | length 8.5
  Component Side w0.2: Q2.1@196.377,271.384 196.469,271.384 197.3,270.553 197.3,268.749 198.252,267.797 200.163,267.797 P3.1@201.676,266.284
NetP4_2: P4.2 U3.3 | length 5.8
  Component Side w0.2: U3.3@216.309,266.926 217.241,266.926 218.5,268.184 P4.2@218.5,271.311
NetP5_1: P5.1 R19.2 | length 4.4
  Component Side w0.2: P5.1@245.5,276 246.919,277.419 249.25,277.419 R19.2@249.25,277.4
NetP7_1: P7.1 P8.1 P9.1 Q5.1 | length 8
  Component Side w0.254: Q5.1@237.4,273.149 238.35,272.199 P7.1@239,272.199 P8.1@242,272.199 P9.1@245,272.199
NetP7_3: P7.3 P8.3 P9.3 U1.17 U4.6 | length 34.8
  Component Side w0.2: U4.6@230.119,255.37 230.119,256.255 v1(230.378,256.515) ; v1(230.464,265.181) 233.05,267.767 U1.17@233.05,269.2
  Component Side w0.254: U1.17@233.05,269.2 236.919,269.2 P7.3@239,267.119 P8.3@242,267.119 P9.3@245,267.119
  Bottom Layer w0.2: v1(230.378,256.515) 227.381,256.515 225.485,258.411 225.485,259.013 228.408,261.936 230.321,261.936 230.464,262.079 v1(230.464,265.181)
NetP7_4: P7.4 P8.4 P9.4 U1.16 U4.5 | length 34.2
  Component Side w0.2: U4.5@231.389,255.37 231.389,254.183 v1(231.699,253.873) ; U1.16@234.45,267.8 235.779,267.8 P7.4@239,264.579 ; v1(240.284,259.055) 240.284,260.134 240.665,260.515 242.049,260.515 243.002,261.468 243.002,263.577 P8.4@242,264.579
  Component Side w0.254: P7.4@239,264.579 P8.4@242,264.579 P9.4@245,264.579
  Bottom Layer w0.2: v1(231.699,253.873) 232.435,254.61 239.319,254.61 240.284,255.575 v1(240.284,259.055)
NetP7_5: P7.5 U1.14 | length 7.1
  Component Side w0.2: U1.14@234.45,266.2 236.3,266.2 237.5,265 237.5,263.539 P7.5@239,262.039
NetP7_6: P7.6 U1.13 | length 10.9
  Component Side w0.2: U1.13@234.45,265.4 233.919,265.4 233.348,264.829 233.348,261.971 235.821,259.499 P7.6@239,259.499
NetP8_5: P8.5 U1.11 | length 9.7
  Component Side w0.2: U1.11@234.45,263.8 236.7,263.8 237.096,263.404 237.096,262.49 238.575,261.012 240.973,261.012 P8.5@242,262.039
NetP8_6: P8.6 U1.25 | length 36.1
  Component Side w0.2: v1(224.358,269.9) 224.879,269.9 226.516,268.263 226.516,267.8 U1.25@226.05,267.8 ; v1(225.349,270.891) 225.349,273.406 v1(226.543,274.599)
  Bottom Layer w0.2: v1(224.358,269.9) v1(225.349,270.891) ; v1(226.543,274.599) 226.543,274.523 232.334,274.498 233.045,273.787 233.045,272.478 233.362,272.161 233.934,272.161 237.871,268.224 240.513,268.224 240.995,267.741 240.995,260.504 P8.6@242,259.499
NetP9_5: P9.5 U1.2 | length 20.2
  Component Side w0.2: U1.2@228.25,260.8 228.25,260.269 230.048,258.472 231.095,258.472 231.133,258.51 237.762,258.51 237.872,258.4 242.38,258.4 245,261.019 P9.5@245,262.039
NetP9_6: P9.6 R13.1 U1.1 U3.7 | length 42.7
  Component Side w0.2: U3.7@221.109,268.196 222.425,268.196 222.86,267.761 v1(222.86,267.444) ; v1(227.965,267.736) 228.434,267.267 228.434,262.343 227.863,261.772 227.45,261.747 U1.1@227.45,260.8 227.45,259.709 229.052,258.107 235.105,258.107 235.153,258.155 237.406,258.155 237.511,258.05 243.551,258.05 P9.6@245,259.499 ; v1(250.304,259.499) 250.673,259.867 251.714,259.867 251.739,259.842 251.739,259.459 R13.1@251.85,259.459
  Bottom Layer w0.2: v1(222.86,267.444) 223.003,267.3 227.529,267.3 v1(227.965,267.736) ; P9.6@245,259.499 v1(250.304,259.499)
NetP11_2: P11.2 U11.8 | length 3
  Component Side w0.254: U11.8@204.677,256 206.035,256 P11.2@207.177,257.142
NetP12_1: P12.1@252.399,250.024 Q6.1@251.325,257.95 | length 9.3
  Component Side w0.2: Q6.1@251.325,257.95 250.825,257.95 250.499,257.624 250.499,251.924 P12.1@252.399,250.024
NetP12_2: P12.2@252.399,252.564 R101.2 | length 2.2
  Component Side w0.254: R101.2@251.999,254.599 251.999,252.964 P12.2@252.399,252.564
NetP23_1: P23.1 Q6.1@210.439,279.55 | length 6.7
  Component Side w0.2: Q6.1@210.439,279.55 210.439,277.605 209.967,277.132 209.967,275.869 210.004,275.832 210.507,275.832 P23.1@212.089,274.25
NetP40_1: P40.1 R1.2 U6.17 | length 43.6
  Component Side w0.2: v1(233.528,271.094) 233.528,272.327 233.5,272.355 233.5,277.81 235.19,279.5 U6.17@237.7,279.5 ; v1(244.856,254.33) 245.437,253.749 R1.2@247.649,253.749
  Component Side w0.254: R1.2@247.649,253.749 247.649,251.599 P40.1@249.149,250.099
  Bottom Layer w0.2: v1(233.528,271.094) 238,266.622 238,264.018 238.442,263.576 240.119,263.576 240.487,263.207 240.487,260.032 240.95,259.57 240.95,254.363 240.982,254.33 v1(244.856,254.33)
NetP41_1: P41.1 R2.2 U6.16 | length 50
  Component Side w0.2: v1(236.347,275.184) 237.287,274.244 238.631,274.244 239.243,273.632 242.405,273.632 242.776,274.002 242.776,277.044 240.97,278.85 U6.16@237.7,278.85 ; R2.2@243.324,254.599 243.58,254.599 244.792,253.387 245.401,253.387 P41.1@246.149,252.639
  Bottom Layer w0.2: v1(236.347,275.184) 236.347,273.685 236.753,273.279 242.976,273.279 243.002,273.253 243.002,257.782 246.149,254.635 P41.1@246.149,252.639
NetP42_1: P42.1 R3.2 U6.14 | length 2.4
  Component Side w0.254: R3.2@241.149,251.499 242.549,250.099 P42.1@242.974,250.099